# Altium PCB capacitive-liquid-level-sensor.PcbDoc
Units mil, origin at the board's own origin, x right, y up, seen from the top; angles counter-clockwise.
Board outline 2132.87 x 1078.74 mil, 2 copper layers (Top Layer, Bottom Layer), stack 61.756 mil thick; 31 components, 18 nets, 103 pads, 69 vias.
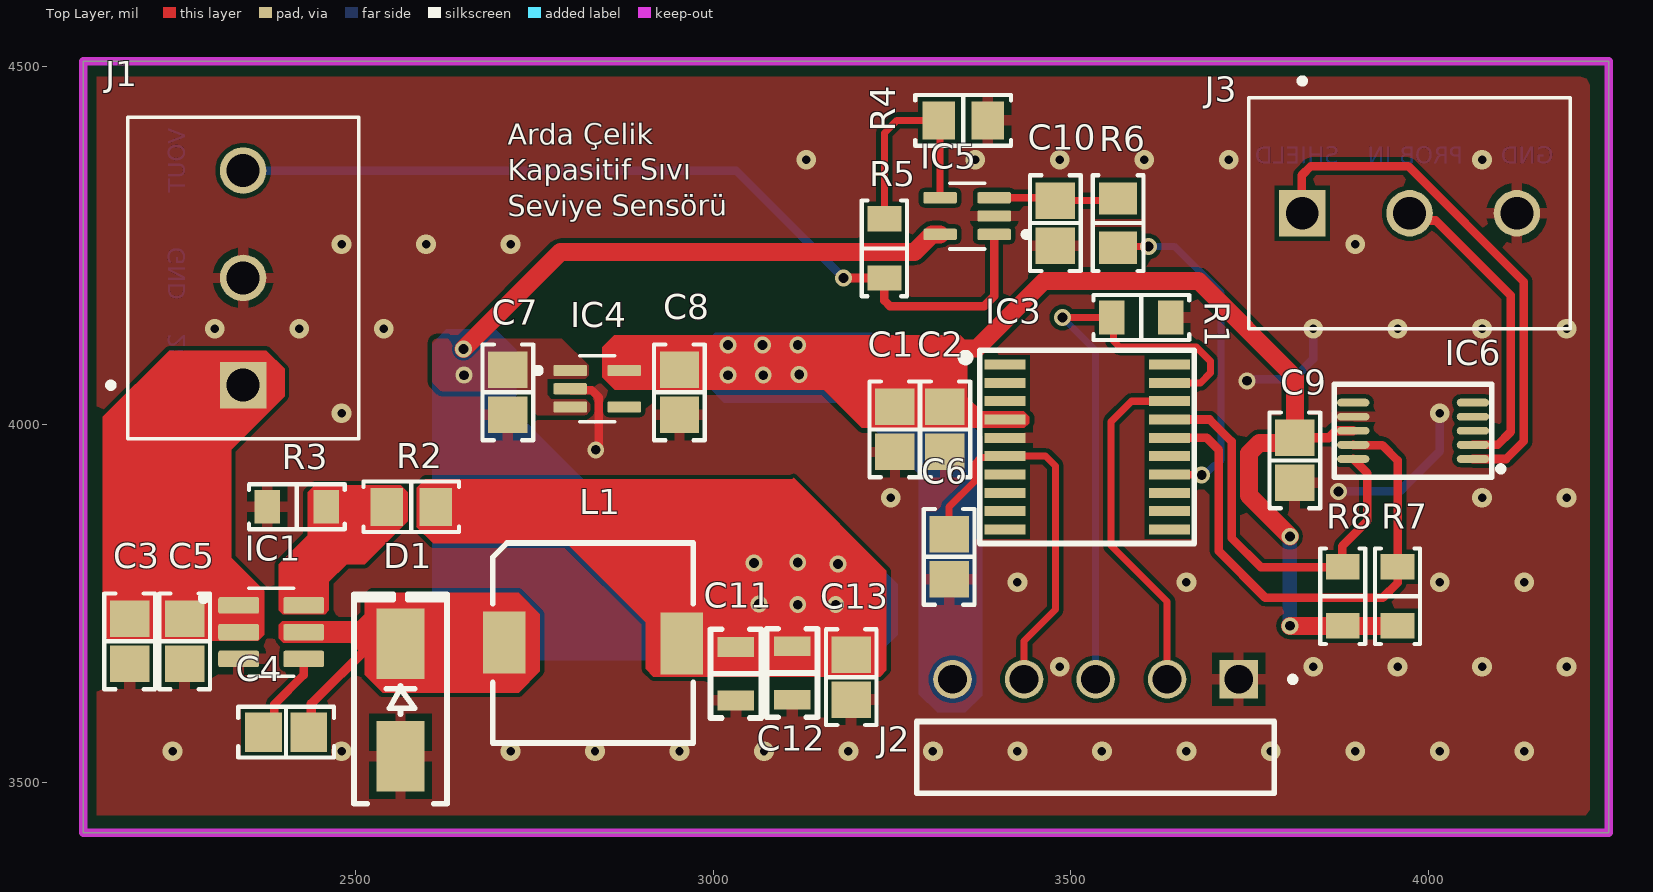
[diagram p0: Top Layer view]
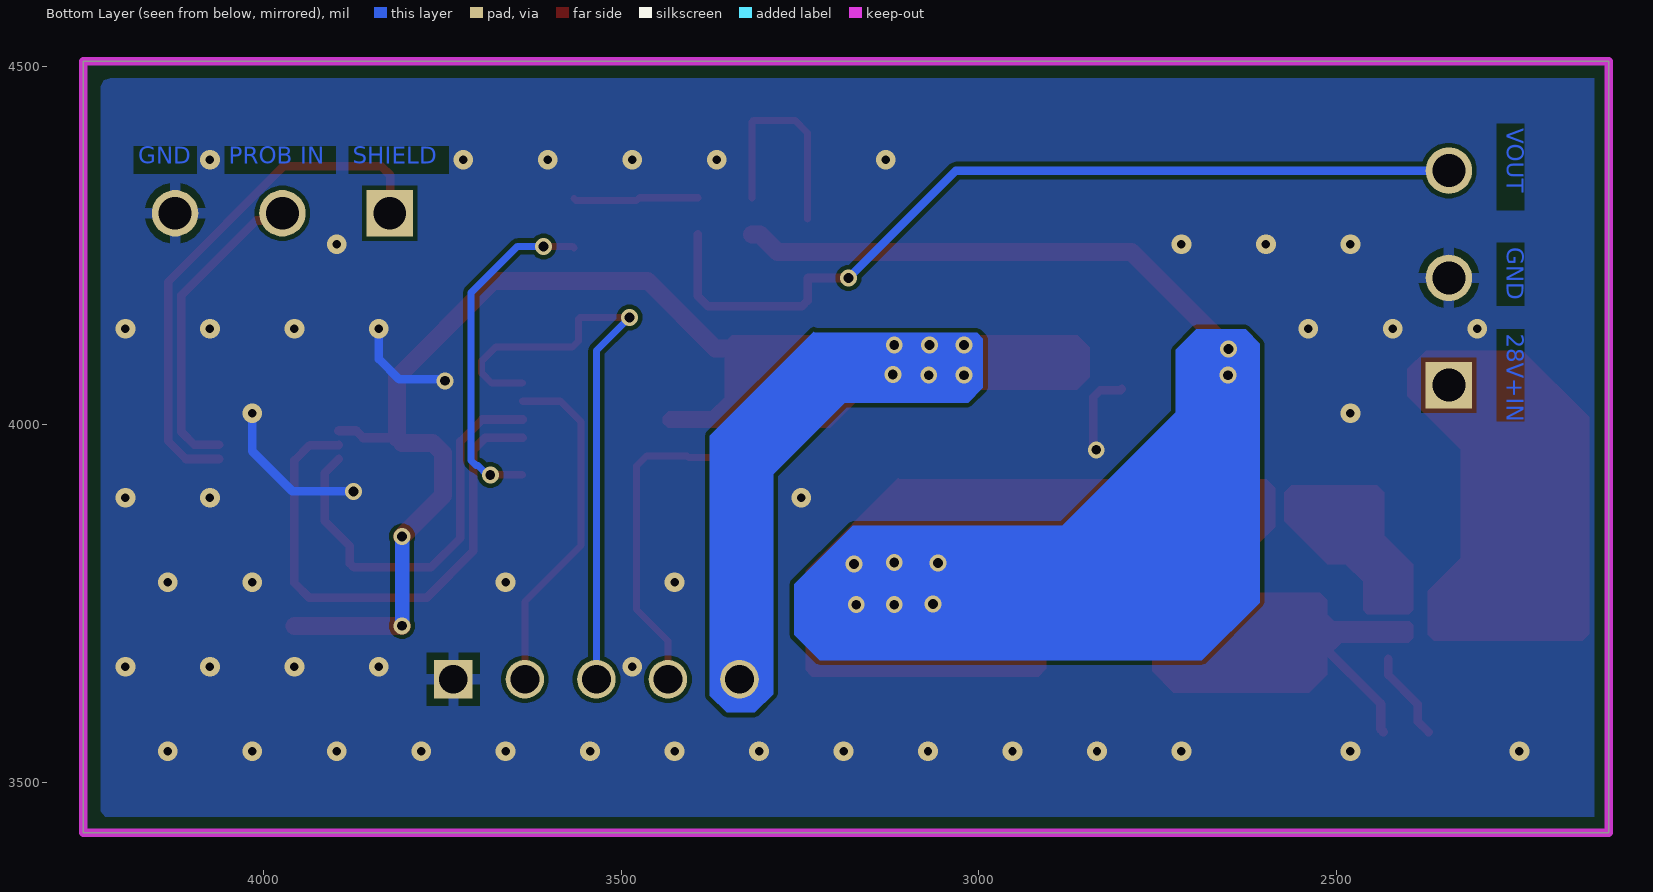
[diagram p1: Bottom Layer view, seen from below]
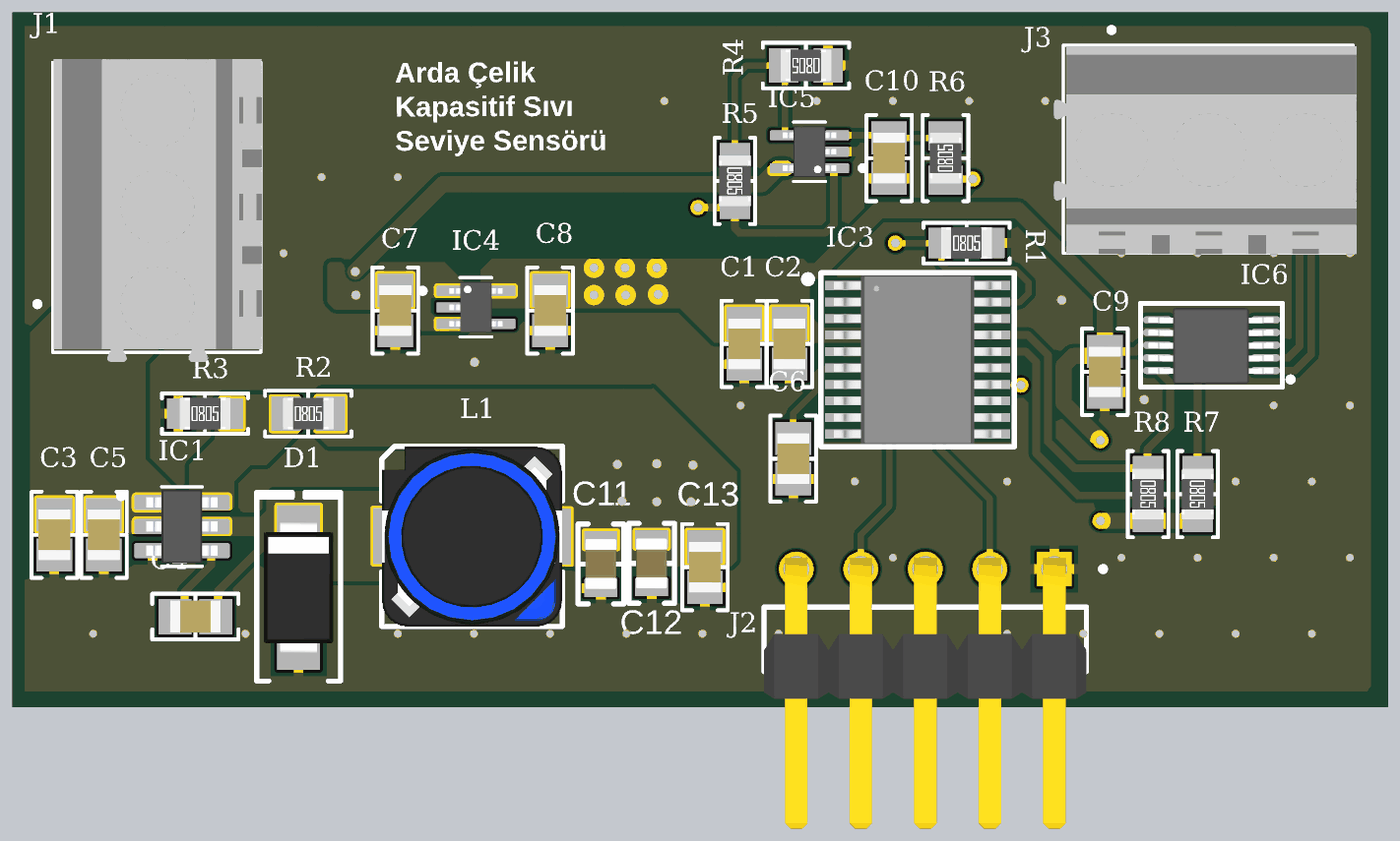
[diagram p2: 3D render of the assembled board from above, using the file's embedded part models]

## Layer stack, top to bottom
Top Solder: solder mask 1, SM-001, Dk 4
Top Layer: signal copper 1.378
Dielectric 1: core 59, Core-043, Dk 4.3
Bottom Layer: signal copper 1.378
Bottom Solder: solder mask 1, SM-001, Dk 4

## Board outline
2119.09,3429.13 4251.97,3429.13 4251.97,4507.87 2119.09,4507.87

## Design rules (kind name [scope] priority, off if disabled: settings)
Clearance [All] p1: gap=6 ignorepadtopadclearanceinfootprint=FALSE
Clearance Clearance_Polygon [InPolygon] p2: gap=10 ignorepadtopadclearanceinfootprint=FALSE
MinimumSolderMaskSliver [All] p1: minsoldermaskwidth=0
PlaneClearance [All] p1: clearance=30
PlaneConnect [All] p1: planeconnectstyle=Relief reliefexpansion=15 reliefentries=4 reliefconductorwidth=15 reliefairgap=10
PolygonConnect [All] p1: connectstyle=Relief reliefconductorwidth=15 reliefentries=4 polygonreliefangle="90 Angle" airgapwidth=10
RoutingVias [All] p1: holewidth=28 width=50 viastyle="Through Hole" minholewidth=28 minwidth=50 maxholewidth=28 maxwidth=50
SilkToSilkClearance [All] p1: silktosilkclearance=0
SilkToSolderMaskClearance [IsPad] p1: minsilkscreentomaskgap=0 clearancetoexposedcopper=TRUE
SolderMaskExpansion [All] p1: expansion=4 istentingtop=FALSE
SupplyNets "Schematic Supply Nets_3" [InNet('3.3V')] p1: voltage=0.000
SupplyNets "Schematic Supply Nets_2" [InNet('5V')] p2: voltage=0.000
SupplyNets "Schematic Supply Nets_1" [InNet('GND')] p3: voltage=0.000
SupplyNets "Schematic Supply Nets" [InNet('28V')] p4: voltage=0.000
Width [All] p1: maxlimit=35 minlimit=10 preferedwidth=10 minimp=50.000000 maximp=50.000000 favimp=50.000000
25 further rules are at their usual default settings.

## Components (designator, comment, footprint, x,y, rotation, side; value= is the part's Value field where it differs from the comment)
C1 "4.7µF" "CAP 0805_2012" 3253.94,3993.11 r90 top
C2 "0.1 µF" "CAP 0805_2012" 3323.82,3993.11 r90 top
C3 "0.1 µF" "CAP 0805_2012" 2184.06,3696.85 r90 top
C4 "0.1 µF" "CAP 0805_2012" 2402.72,3569.92 r180 top
C5 "4.7 µF" "CAP 0805_2012" 2260.83,3696.85 r90 top
C6 "0.1 µF" "CAP 0805_2012" 3329.72,3814.96 r90 top
C7 "1µF" "CAP 0805_2012" 2712.72,4044.92 r270 top
C8 "1µF" "CAP 0805_2012" 2952.72,4044.92 r270 top
C9 "0.1 µF" "CAP 0805_2012" 3812.99,3949.8 r90 top
C10 "1µF" "CAP 0805_2012" 3478.35,4281.5 r270 top
C11 "10 µF" "MURATA GRM21B 0805_2012" 3031.5,3651.57 r90 top
C12 "10 µF" "MURATA GRM21B 0805_2012" 3110.24,3652.56 r90 top
C13 "4.7µF" "CAP 0805_2012" 3192.91,3646.65 r90 top
D1 "SS16-M3/61T" "DO214AC SMA" 2562.72,3614.92 r90 top
IC1 "LMR14006YDDCR" TSOT-23-6 2381.89,3709.65 r0 top
IC3 "STM32G030F6P6" TSSOP20 3522.64,3968.5 r0 top
IC4 "TLV70033" SOT23-5 2837.72,4049.92 r0 top
IC5 "TLV9001IDBVR" SOT23-5 3354.92,4291.34 r180 top
IC6 "FDC1004DGSR" "10-VSSOP (DGS)" 3978.35,3991.14 r180 top
J1 "284392-3" 284392-3 2342.72,4204.92 r90 top
J2 "TSW-105-08-G-S-RA" TSW-105-08-G-S-RA 3534.45,3643.7 r0 top
J3 "284392-3" 284392-3 3973.43,4295.28 r0 top
L1 "10µH" "TDK SLF7032" 2831.73,3694.43 r0 top
R1 "10 kOhms" "YAGEO RES 0805_2012" 3598.43,4149.61 r0 top
R2 "54.9 kOhms" "RES 0805_2012" 2577.72,3884.92 r0 top
R3 "10 kOhms" "YAGEO RES 0805_2012" 2417.72,3884.92 r0 top
R4 "10 kOhms" "RES 0805_2012" 3349.41,4425.2 r180 top
R5 "4.7 kOhms" "YAGEO RES 0805_2012" 3239.17,4246.06 r270 top
R6 "10 kOhms" "RES 0805_2012" 3565.95,4281.5 r90 top
R7 "4.7 kOhms" "YAGEO RES 0805_2012" 3956.69,3759.84 r270 top
R8 "4.7 kOhms" "YAGEO RES 0805_2012" 3879.92,3759.84 r270 top

## Footprints (in the part's own frame and the unit in brackets; to place one, negate y for a bottom-side part, rotate by r counter-clockwise, add the part's x,y. Pads: shape width x height; smd on the part's side, far side on the other; paste and mask are expansions set on the pad)
"10-VSSOP (DGS)" [mm]
  oval 1.15x0.279 smd paste+0 mask+0: 1(-2.125,1) 2(-2.125,0.5) 3(-2.125,0) 4(-2.125,-0.5) 5(-2.125,-1) 6(2.125,-1) 7(2.125,-0.5) 8(2.125,0) 9(2.125,0.5) 10(2.125,1)
  silkscreen extent -3.16,-1.65 2.79,1.65, body extent -2.44,-1.5 2.49,1.54, height 1.16
284392-3 [mm]
  rect 1.65x1.65 / inner round 1.65 / far side rect 1.65x1.65 hole 1.168: 1(-3.81,0)
  round 1.65 hole 1.168: 2(0,0) 3(3.81,0)
  silkscreen extent -5.71,-4.1 5.71,4.8, body extent -6.09,-4.14 5.84,4.06, height 12.62
"CAP 0805_2012" [mm] "Chip Capacitor, 2-Leads, Body 2.00x1.20mm, IPC Medium Density"
  rect 1.3x1.4 smd: 1(-0.8,0) 2(0.8,0)
  silkscreen extent -1.7,-0.9 1.7,0.9, body extent -1,-0.64 1,0.64, height 1.26
"DO214AC SMA" [mm] "Molded Diode, 2-Leads, Body 4.30x2.60mm, IPC Medium Density"
  rect 2.5x1.7 smd: 1(-2,0) 2(2,0)
  silkscreen extent -3.68,-1.65 3.75,1.65, body extent -2.6,-1.37 2.6,1.37, height 2.4
"MURATA GRM21B 0805_2012" [mm] "Chip Capacitor, 2-Leads, Body 2.00x1.25mm"
  rect 0.7x1.3 smd: 1(-0.95,0) 2(0.95,0)
  silkscreen extent -1.58,-0.9 1.58,0.9, body extent -1,-0.63 1,0.63, height 1.25
"RES 0805_2012" [mm] "Chip Resistor, 2-Leads, Body 2.00x1.25mm, IPC Medium Density"
  rect 1.15x1.35 smd: 1(-0.875,0) 2(0.875,0)
  silkscreen extent -1.7,-0.9 1.7,0.9, body extent -1,-0.62 1,0.63, height 0.6
SOT23-5 [mm]
  rrect25% 1.19x0.4 smd: 1(-0.96,0.65) 2(-0.96,0) 3(-0.96,-0.65) 4(0.96,-0.65) 5(0.96,0.65)
  silkscreen extent -2.2,-1.17 0.63,1.17, body extent -1.05,-1 1.05,1, height 1.1
"TDK SLF7032" [mm] "Power Inductor, 2-Leads, TDK, SLF7032T-221MR29-2PF"
  rect 1.5x2.2 smd: 1(-3.15,0.013) 2(3.15,-0.012)
  silkscreen extent -3.56,-3.55 3.56,3.55, body extent -3.56,-3.56 3.56,3.54, height 3.39
TSOT-23-6 [mm]
  rrect25% 1.45x0.59 smd: 1(-1.155,0.95) 2(-1.155,0) 3(-1.155,-0.95) 4(1.155,-0.95) 5(1.155,0) 6(1.155,0.95)
  silkscreen extent -2.5,-1.57 0.8,1.57, body extent -1.4,-1.45 1.4,1.45, height 1.1
TSSOP20 [mil]
  rect 57.56x13.97 smd paste+0 mask+0: 1(-115,115.16) 2(-115,89.57) 3(-115,63.98) 4(-115,38.39) 5(-115,12.8) 6(-115,-12.8) 7(-115,-38.39) 8(-115,-63.98) 9(-115,-89.57) 10(-115,-115.16) 11(115,-115.16) 12(115,-89.57) 13(115,-63.98) 14(115,-38.39) 15(115,-12.8) 16(115,12.8) 17(115,38.39) 18(115,63.98) 19(115,89.57) 20(115,115.16)
  silkscreen extent -175,-135 150,135, body extent -130,-130 130,130, height 47
TSW-105-08-G-S-RA [mm]
  rect 1.37x1.37 hole 1.02: 1(5.08,0)
  round 1.37 hole 1.02: 2(2.54,0) 3(0,0) 4(-2.54,0) 5(-5.08,0)
  silkscreen extent -6.35,-4.04 7.1,0.1, body extent -6.35,-10.24 6.35,0.45, height 2.54
"YAGEO RES 0805_2012" [mm] "Chip Resistor, 2-Leads, Body 2.00x1.25mm"
  rect 0.9x1.2 smd: 1(-1.05,0) 2(1.05,0)
  silkscreen extent -1.7,-0.8 1.7,0.8, body extent -1,-0.62 1,0.63, height 0.6

## Part data
C1: library part 0805YC475MAT2A, "CAP CER 4.7UF 16V X7R 0805", Device Package="0805 (2012 Metric)", Manufacturer="AVX Corporation", Operating Temperature="-55°C ~ 125°C", Supplier Part Number 1=478-10575-1-ND, Temperature Coefficient=X7R, Tolerance=±20%, Voltage - Rated=16V, Applications="General Purpose", Capacitance=4.7µF, ComponentLink1Description=Datasheet, ComponentLink1URL=http://datasheets.avx.com/X7RDielectric.pdf, ComponentLink2Description="DigiKey Link", ComponentLink2URL=http://digikey.com/product-detail/en/avx-corporation/0805YC475MAT2A/478-10575-1-ND/6797621, lastupdated="2.09.2020 01:04:40", Lifecycle Status=Active, Minimum Order=1, Mounting Type="Surface Mount, MLCC", Package / Case="0805 (2012 Metric)", Packaging=TapeAndReel, Part Number=0805YC475MAT2A, Part Status=Active, partid=3443, price=0.12, series=-, Size / Dimension="0.079\" L x 0.049\" W (2.01mm x 1.25mm)", Supplier 1=DigiKey, Thickness (Max)="0.060\" (1.52mm)"
C2 C6 C9: library part 160R15W104KV4T, "CAP CER 0.1UF 16V X7R 0805", Device Package="0805 (2012 Metric)", Manufacturer="Johanson Dielectrics Inc.", Operating Temperature="-55°C ~ 125°C", Supplier Part Number 1=709-1183-1-ND, Temperature Coefficient=X7R, Tolerance=±10%, Voltage - Rated=16V, Applications="General Purpose", Capacitance="0.1 µF", ComponentLink1Description=Datasheet, ComponentLink1URL=https://www.johansondielectrics.com/downloads/catalog/johanson-dielectrics-product-catalog.pdf, ComponentLink2Description="DigiKey Link", ComponentLink2URL=https://www.digikey.com/en/products/detail/johanson-dielectrics-inc/160R15W104KV4T/1859428, lastupdated="9.02.2024 20:15:52", Lifecycle Status=Active, Minimum Order=1, Mounting Type="Surface Mount, MLCC", Package / Case="0805 (2012 Metric)", Packaging=TapeAndReel, Part Number=160R15W104KV4T, Part Status=Active, partid=9125, price=0.03, series=-, Size / Dimension="0.080\" L x 0.050\" W (2.03mm x 1.27mm)", Supplier 1=DigiKey, Thickness (Max)="0.050\" (1.27mm)"
C3: library part 885012207098, "CAP CER 0.1UF 50V X7R 0805", Device Package="0805 (2012 Metric)", Manufacturer="Würth Elektronik", Operating Temperature="-55°C ~ 125°C", Supplier Part Number 1=732-8080-1-ND, Temperature Coefficient=X7R, Tolerance=±10%, Voltage - Rated=50V, Applications="General Purpose", Capacitance="0.1 µF", ComponentLink1Description=Datasheet, ComponentLink1URL=https://katalog.we-online.de/pbs/datasheet/885012207098.pdf, ComponentLink2Description="DigiKey Link", ComponentLink2URL=https://www.digikey.com/en/products/detail/würth-elektronik/885012207098/5453935, lastupdated="9.02.2024 20:15:51", Lifecycle Status=Active, Minimum Order=1, Mounting Type="Surface Mount, MLCC", Package / Case="0805 (2012 Metric)", Packaging=TapeAndReel, Part Number=885012207098, Part Status=Active, partid=9164, price=0.03, series=WCAP-CSGP, Size / Dimension="0.079\" L x 0.049\" W (2.00mm x 1.25mm)", Supplier 1=DigiKey, Thickness (Max)="0.035\" (0.90mm)"
C4: library part 0805Y0250104KXT, "CAP CER 0.1UF 25V X7R 0805", Device Package="0805 (2012 Metric)", Manufacturer="Knowles Syfer", Operating Temperature="-55°C ~ 125°C", Supplier Part Number 1=1608-1010-1-ND, Temperature Coefficient=X7R, Tolerance=±10%, Voltage - Rated=25V, Applications="Boardflex Sensitive", Capacitance="0.1 µF", ComponentLink1Description=Datasheet, ComponentLink1URL=https://www.knowlescapacitors.com/getattachment/2dbfc8bc-e2b3-4b4d-afb1-43b011b9ebe0/High-Std-Voltage.aspx, ComponentLink2Description="DigiKey Link", ComponentLink2URL=https://www.digikey.com/en/products/detail/knowles-syfer/0805Y0250104KXT/5729991, Features="Soft Termination", lastupdated="9.02.2024 20:16:06", Lifecycle Status=Active, Minimum Order=1, Mounting Type="Surface Mount, MLCC", Package / Case="0805 (2012 Metric)", Packaging=TapeAndReel, Part Number=0805Y0250104KXT, Part Status=Active, partid=3471, price=0.15, series=FlexiCap™, Size / Dimension="0.079\" L x 0.049\" W (2.00mm x 1.25mm)", Supplier 1=DigiKey, Thickness (Max)="0.051\" (1.30mm)"
C5: library part CGA4J1X7R1H475K125AE, "CAP CER 4.7UF 50V X7R 0805", Device Package="0805 (2012 Metric)", Manufacturer="TDK Corporation", Operating Temperature="-55°C ~ 125°C", Ratings=AEC-Q200, Supplier Part Number 1=445-181410-1-ND, Temperature Coefficient=X7R, Tolerance=±10%, Voltage - Rated=50V, Applications="Automotive, Boardflex Sensitive", Capacitance="4.7 µF", ComponentLink1Description=Datasheet, ComponentLink1URL=https://product.tdk.com/info/en/catalog/datasheets/mlcc_automotive_soft_en.pdf?ref_disty=digikey, ComponentLink2Description="DigiKey Link", ComponentLink2URL=https://www.digikey.com/en/products/detail/tdk-corporation/CGA4J1X7R1H475K125AE/9744776, Features="Soft Termination", lastupdated="9.02.2024 20:15:46", Lifecycle Status=Active, Minimum Order=1, Mounting Type="Surface Mount, MLCC", Package / Case="0805 (2012 Metric)", Packaging=TapeAndReel, Part Number=CGA4J1X7R1H475K125AE, Part Status=Active, partid=39626, price=0.15, series=CGA, Size / Dimension="0.079\" L x 0.049\" W (2.00mm x 1.25mm)", Supplier 1=DigiKey, Thickness (Max)="0.059\" (1.50mm)"
C7 C8 C10: library part 0805YC105KAT4A, "CAP CER 1UF 16V X7R 0805", Device Package="0805 (2012 Metric)", Manufacturer="AVX Corporation", Operating Temperature="-55°C ~ 125°C", Supplier Part Number 1=478-11534-1-ND, Temperature Coefficient=X7R, Tolerance=±10%, Voltage - Rated=16V, Applications="General Purpose", Capacitance=1µF, ComponentLink1Description=Datasheet, ComponentLink1URL=http://datasheets.avx.com/X7RDielectric.pdf, ComponentLink2Description="DigiKey Link", ComponentLink2URL=http://digikey.com/product-detail/en/avx-corporation/0805YC105KAT4A/478-11534-1-ND/8108826, lastupdated="2.09.2020 01:04:40", Lifecycle Status=Active, Minimum Order=1, Mounting Type="Surface Mount, MLCC", Package / Case="0805 (2012 Metric)", Packaging=TapeAndReel, Part Number=0805YC105KAT4A, Part Status=Active, partid=3647, price=0.04, series=-, Size / Dimension="0.079\" L x 0.049\" W (2.01mm x 1.25mm)", Supplier 1=DigiKey, Thickness (Max)="0.055\" (1.40mm)"
C11 C12: library part GRM21BZ71E106KE15L, "CAP CER 10UF 25V X7R 0805", Device Package="0805 (2012 Metric)", Manufacturer="Murata Electronics", Operating Temperature="-55°C ~ 125°C", Supplier Part Number 1=490-GRM21BZ71E106KE15LCT-ND, Temperature Coefficient=X7R, Tolerance=±10%, Voltage - Rated=25V, Applications="General Purpose", Capacitance="10 µF", ComponentLink1Description=Datasheet, ComponentLink1URL=https://search.murata.co.jp/Ceramy/image/img/A01X/G101/ENG/GRM21BZ71E106KE15-01.pdf, ComponentLink2Description="DigiKey Link", ComponentLink2URL=https://www.digikey.com/en/products/detail/murata-electronics/GRM21BZ71E106KE15L/13904911, lastupdated="27.08.2024 09:29:54", Lifecycle Status=Active, Minimum Order=1, Mounting Type="Surface Mount, MLCC", Package / Case="0805 (2012 Metric)", Packaging=TapeAndReel, Part Number=GRM21BZ71E106KE15L, Part Status=Active, partid=47278, price=0.05, series=GRM, Size / Dimension="0.079\" L x 0.049\" W (2.00mm x 1.25mm)", Supplier 1=DigiKey, Thickness (Max)="0.057\" (1.45mm)"
C13: library part 08053C475MAT2A, "CAP CER 4.7UF 25V X7R 0805", Device Package="0805 (2012 Metric)", Manufacturer="AVX Corporation", Operating Temperature="-55°C ~ 125°C", Supplier Part Number 1=478-12472-1-ND, Temperature Coefficient=X7R, Tolerance=±20%, Voltage - Rated=25V, Applications="General Purpose", Capacitance=4.7µF, ComponentLink1Description=Datasheet, ComponentLink1URL=http://datasheets.avx.com/X7RDielectric.pdf, ComponentLink2Description="DigiKey Link", ComponentLink2URL=http://digikey.com/product-detail/en/avx-corporation/08053C475MAT2A/478-12472-1-ND/9749324, lastupdated="2.09.2020 01:04:10", Lifecycle Status=Active, Minimum Order=1, Mounting Type="Surface Mount, MLCC", Package / Case="0805 (2012 Metric)", Packaging=TapeAndReel, Part Number=08053C475MAT2A, Part Status=Active, partid=17332, price=0.12, series=-, Size / Dimension="0.079\" L x 0.049\" W (2.01mm x 1.25mm)", Supplier 1=DigiKey, Thickness (Max)="0.060\" (1.52mm)"
D1: "DIODE SCHOTTKY 1A 60V DO-214AC", Current - Average Rectified (Io)=1A, Current - Reverse Leakage @ Vr="200µA @ 60V", Manufacturer="Vishay Semiconductor Diodes Division", Operating Temperature - Junction="-65°C ~ 150°C", Package / Case="DO-214AC, SMA", Supplier Device Package="DO-214AC (SMA)", Supplier Part Number 1=SS16-M3/61TGICT-ND, Voltage - DC Reverse (Vr) (Max)=60V, Voltage - Forward (Vf) (Max) @ If="750mV @ 1A", ComponentLink1Description=Datasheet, ComponentLink1URL=//media.digikey.com/pdf/Data%20Sheets/Vishay%20Semiconductors/SS12-SS16.pdf, ComponentLink2Description="DigiKey Link", ComponentLink2URL=http://digikey.com/product-detail/en/vishay-semiconductor-diodes-division/SS16-M3-61T/SS16-M3-61TGICT-ND/9601211, Diode Type=Schottky, lastupdated="3.06.2024 19:54:33", Lifecycle Status=Active, Minimum Order=1, Mounting Type="Surface Mount", Packaging=TapeAndReel, Part Number=SS16-M3/61T, Part Status=Active, partid=1996, price=0.12, series=-, Speed="Fast Recovery =< 500ns, > 200mA (Io)", Supplier 1=DigiKey
IC1: "Buck Switching Regulator IC Positive Adjustable 0.765V 1 Output 600mA SOT-23-6 Thin, TSOT-23-6"
IC3: "ARM® Cortex®-M0+ STM32G0 Microcontroller IC 32-Bit 64MHz 32KB (32K x 8) FLASH 20-TSSOP"
IC4: "Linear Voltage Regulator IC Positive Fixed 1 Output 200mA SC-70-5"
IC5: "CMOS Amplifier 1 Circuit Rail-to-Rail SOT-23-5"
IC6: "Capacitive Touch Proximity Only 10-VSSOP"
J1 J3: library part "277-1264-ND(FDC1004 İÇİN)", "3 Position Wire to Board Terminal Block Horizontal with Board 0.200\" (5.08mm) Through Hole"
J2: "Connector Header Through Hole, Right Angle 5 position 0.100\" (2.54mm)"
L1: library part SLF7032T-100M1R4-2PF, "FIXED IND 10UH 1.4A 63.6 MOHM", Current Rating (Amps)=1.4A, DC Resistance (DCR)="63.6mOhm Max", Device Package=Nonstandard, Manufacturer="TDK Corporation", Operating Temperature="-40°C ~ 105°C", Supplier Part Number 1=445-1998-1-ND, Tolerance=±20%, Inductance Frequency - Test=100kHz, ComponentLink1Description=Datasheet, ComponentLink1URL=//media.digikey.com/pdf/Data%20Sheets/TDK%20PDFs/SLF7032_Type.pdf, ComponentLink2Description="DigiKey Link", ComponentLink2URL=http://digikey.com/product-detail/en/tdk-corporation/SLF7032T-100M1R4-2PF/445-1998-1-ND/755405, Height - Seated (Max)="0.134\" (3.40mm)", lastupdated="2.09.2020 01:30:24", Lifecycle Status=Active, Material - Core=Ferrite, Minimum Order=1, Mounting Type="Surface Mount", Package / Case=Nonstandard, Packaging=TapeAndReel, Part Number=SLF7032T-100M1R4-2PF, Part Status=Active, partid=3677, price=0.43, series=SLF, Shielding=Shielded, Size / Dimension="0.276\" L x 0.276\" W (7.00mm x 7.00mm)", Supplier 1=DigiKey, Type=Wirewound, Inductance=10µH
R1: library part RV0805FR-0710KL, "RES 10K OHM 1% 1/8W 0805", Device Package="0805 (2012 Metric)", Manufacturer=Yageo, Operating Temperature="-55°C ~ 155°C", Power (Watts)="0.125W, 1/8W", Ratings=AEC-Q200, Supplier Device Package=0805, Supplier Part Number 1=13-RV0805FR-0710KLCT-ND, Temperature Coefficient=±200ppm/°C, Tolerance=±1%, ComponentLink1Description=Datasheet, ComponentLink1URL=https://www.yageo.com/upload/media/product/productsearch/datasheet/rchip/PYu-RV_51_RoHS_L_12.pdf, ComponentLink2Description="DigiKey Link", ComponentLink2URL=https://www.digikey.com/en/products/detail/yageo/RV0805FR-0710KL/17021062, Composition="Thick Film", Features="Automotive AEC-Q200, High Voltage, Moisture Resistant", Height - Seated (Max)="0.024\" (0.60mm)", lastupdated="25.07.2024 09:19:57", Lifecycle Status=Active, Minimum Order=1, Number of Terminations=2, Package / Case="0805 (2012 Metric)", Packaging=TapeAndReel, Part Number=RV0805FR-0710KL, partid=87554, price=0.05, Resistance="10 kOhms", series=RV, Size / Dimension="0.079\" L x 0.049\" W (2.00mm x 1.25mm)", Supplier 1=DigiKey
R2: library part CRCW080554K9FKEA, "RES SMD 54.9K OHM 1% 1/8W 0805", Device Package="0805 (2012 Metric)", Manufacturer="Vishay Dale", Operating Temperature="-55°C ~ 155°C", Power (Watts)="0.125W, 1/8W", Ratings=AEC-Q200, Supplier Device Package=0805, Supplier Part Number 1=541-54.9KCCT-ND, Temperature Coefficient=±100ppm/°C, Tolerance=±1%, ComponentLink1Description=Datasheet, ComponentLink1URL=http://www.vishay.com/docs/20035/dcrcwe3.pdf, ComponentLink2Description="DigiKey Link", ComponentLink2URL=https://www.digikey.com/en/products/detail/vishay-dale/CRCW080554K9FKEA/1175835, Composition="Thick Film", Features="Automotive AEC-Q200", Height - Seated (Max)="0.020\" (0.50mm)", lastupdated="8.02.2024 21:02:25", Lifecycle Status=Active, Minimum Order=1, Number of Terminations=2, Package / Case="0805 (2012 Metric)", Packaging=TapeAndReel, Part Number=CRCW080554K9FKEA, Part Status=Active, partid=30745, price=0.01, Resistance="54.9 kOhms", series=CRCW, Size / Dimension="0.079\" L x 0.049\" W (2.00mm x 1.25mm)", Supplier 1=DigiKey
R3: library part RT0805FRE0710KL, "RES SMD 10K OHM 1% 1/8W 0805", Device Package="0805 (2012 Metric)", Manufacturer=Yageo, Operating Temperature="-55°C ~ 155°C", Power (Watts)="0.125W, 1/8W", Supplier Device Package=0805, Supplier Part Number 1=YAG1239CT-ND, Temperature Coefficient=±50ppm/°C, Tolerance=±1%, ComponentLink1Description=Datasheet, ComponentLink1URL=https://www.yageo.com/upload/media/product/productsearch/datasheet/rchip/PYu-RT_1-to-0.01_RoHS_L_11.pdf, ComponentLink2Description="DigiKey Link", ComponentLink2URL=https://www.digikey.com/en/products/detail/yageo/RT0805FRE0710KL/1078908, Composition="Thin Film", Height - Seated (Max)="0.024\" (0.60mm)", lastupdated="25.07.2024 09:20:25", Lifecycle Status=Active, Minimum Order=1, Number of Terminations=2, Package / Case="0805 (2012 Metric)", Packaging=TapeAndReel, Part Number=RT0805FRE0710KL, Part Status=Active, partid=32332, price=0.01, Resistance="10 kOhms", series=RT, Size / Dimension="0.079\" L x 0.049\" W (2.00mm x 1.25mm)", Supplier 1=DigiKey
R4 R6: library part CRCW080510K0FKEA, "RES SMD 10K OHM 1% 1/8W 0805", Device Package="0805 (2012 Metric)", Manufacturer="Vishay Dale", Operating Temperature="-55°C ~ 155°C", Power (Watts)="0.125W, 1/8W", Ratings=AEC-Q200, Supplier Device Package=0805, Supplier Part Number 1=541-10.0KCCT-ND, Temperature Coefficient=±100ppm/°C, Tolerance=±1%, ComponentLink1Description=Datasheet, ComponentLink1URL=http://www.vishay.com/docs/20035/dcrcwe3.pdf, ComponentLink2Description="DigiKey Link", ComponentLink2URL=https://www.digikey.com/en/products/detail/vishay-dale/CRCW080510K0FKEA/1175751, Composition="Thick Film", Features="Automotive AEC-Q200", Height - Seated (Max)="0.020\" (0.50mm)", lastupdated="8.02.2024 21:02:37", Lifecycle Status=Active, Minimum Order=1, Number of Terminations=2, Package / Case="0805 (2012 Metric)", Packaging=TapeAndReel, Part Number=CRCW080510K0FKEA, Part Status=Active, partid=28101, price=0.01, Resistance="10 kOhms", series=CRCW, Size / Dimension="0.079\" L x 0.049\" W (2.00mm x 1.25mm)", Supplier 1=DigiKey
R5 R7 R8: library part RC0805FR-074K7P, "RES 4.7K OHM 1% 1/8W 0805", Device Package="0805 (2012 Metric)", Manufacturer=Yageo, Operating Temperature="-55°C ~ 155°C", Power (Watts)="0.125W, 1/8W", Ratings="7C1 RoHS w/out Exemption (100% Pb-Free)", Supplier Device Package=0805, Supplier Part Number 1=YAG1325CT-ND, Temperature Coefficient=±100ppm/°C, Tolerance=±1%, ComponentLink1Description=Datasheet, ComponentLink1URL=http://www.yageo.com/NewPortal/yageodocoutput?fileName=/pdf/R-Chip/PYu-RC_51_RoHS_P_0.pdf, ComponentLink2Description="DigiKey Link", ComponentLink2URL=https://www.digikey.com/en/products/detail/yageo/RC0805FR-074K7P/4935340, Composition="Thick Film", Features="Moisture Resistant", Height - Seated (Max)="0.024\" (0.60mm)", lastupdated="25.07.2024 09:20:26", Lifecycle Status=Active, Minimum Order=1, Number of Terminations=2, Package / Case="0805 (2012 Metric)", Packaging=TapeAndReel, Part Number=RC0805FR-074K7P, Part Status=Active, partid=27895, price=0.01, Resistance="4.7 kOhms", series=RC_P, Size / Dimension="0.079\" L x 0.049\" W (2.00mm x 1.25mm)", Supplier 1=DigiKey

## Via types
v1: diameter 27.56, hole 11.81, Top Layer to Bottom Layer, tented both sides, 46 vias
v2: diameter 23.62, hole 13.78, Top Layer to Bottom Layer, 12 vias
v3: diameter 23.62, hole 13.78, Top Layer to Bottom Layer, tented both sides, 11 vias

## Nets (pads, with @x,y where several pads share a name; then routed paths per layer and width w, separated by ;. In a path a pad name is that pad's centre, name@x,y a point inside that pad or via, vN(x,y) a via of type N, cw(c..) or ccw(c..) an arc to the next point about the centre after c; other vN are vias at no path point)
3.3V: C1.2 C2.2 C8.1 C9.2 IC3.4 IC4.5 IC6.8 J2.5 R7.2 R8.2 | length 1259.5
  Top Layer w13: C9.2 3860.52,3981.3 3870.36,3991.14 IC6.8
  Top Layer w25: 3307.09,4106.3 3368.35,4106.3 3462.84,4200.79 3678.15,4200.79 3812.99,4065.94 C9.2 3806.05,3974.35 3763.76,3974.35 3749.11,3959.71 3749.11,3900.5 v2(3806.1,3843.5) ; v2(3806.1,3718.5) R8.2 R7.2
  Bottom Layer w20: v2(3806.1,3718.5) v2(3806.1,3843.5)
  other v2: 3020.67,4068.9 3069.88,4068.9 3120.08,4069.88 3020.67,4111.22 3068.9,4111.22 3118.11,4111.22
5V: C7.1 C11.2 C12.2 C13.2 IC4.1 IC4.3 IC5.5 L1.2 R2.2 | length 734.3
  Top Layer w12: C7.1 C7.1@2713.62,4075.51
  Top Layer w25: v3(2650.59,4105.31) 2786.42,4241.14 3281.22,4241.14 3305.83,4265.75 IC5.5
  other v3: 3118.11,3748.03 3171.26,3748.03 3063.98,3749.02 3174.21,3805.12 3057.09,3806.1 3118.11,3807.09 2651.57,4068.9
28V: C3.2 C5.2 IC1.1 IC1.2 J1.1
GND: C1.1 C2.1 C3.1 C5.1 C6.1 C7.2 C8.2 C9.1 C10.2 C11.1 C12.1 C13.1 D1.1 IC1.3 IC3.5 IC4.2 IC5.2 IC6.7 J1.2 J2.1 J3.3 R1.2 R3.1 R4.1 | length 485.8
  Top Layer w12: IC4.2 2801.8,4048.05 2829.82,4048.05 2840.07,4037.8 2840.07,3972.15 2835.63,3967.71 v3(2835.63,3964.57)
  Bottom Layer w12: v3(3746.06,4061.02) 3748.29,4063.25 3810.29,4063.25 3838.58,4091.53 v1(3838.58,4133.86) ; v3(3874.02,3906.5) 3959.65,3906.5 4015.75,3962.6 v1(4015.75,4015.75)
  other v1: 2244.09,3543.31 2480.31,3543.31 2716.53,3543.31 2834.64,3543.31 2952.76,3543.31 3070.87,3543.31 3188.98,3543.31 3307.09,3543.31 3425.2,3543.31 3543.31,3543.31 3661.42,3543.31 3779.53,3543.31 3897.64,3543.31 4015.75,3543.31 4133.86,3543.31 3484.25,3661.42 3838.58,3661.42 3956.69,3661.42 4074.8,3661.42 4192.91,3661.42 3425.2,3779.53 3661.42,3779.53 4015.75,3779.53 4133.86,3779.53 3248.03,3897.64 4074.8,3897.64 4192.91,3897.64 2480.31,4015.75 2303.15,4133.86 2421.26,4133.86 2539.37,4133.86 3956.69,4133.86 4074.8,4133.86 4192.91,4133.86 2480.31,4251.97 2598.42,4251.97 2716.53,4251.97 3897.64,4251.97 3129.92,4370.08 3366.14,4370.08 3484.25,4370.08 3602.36,4370.08 3720.47,4370.08 4074.8,4370.08
I2C_SCL: IC3.16 IC6.9 R7.1 | length 745.4
  Top Layer w12: IC3.16 3689.96,3981.3 3706.61,3964.65 3706.61,3822.92 3771.65,3757.87 3936.02,3757.87 3956.69,3778.54 R7.1 3956.69,3949.8 3935.32,3971.17 3894.97,3971.17 IC6.9
I2C_SDA: IC3.17 IC6.10 R8.1 | length 577.1
  Top Layer w12: IC3.17 3693.9,4006.89 3724.61,3976.18 3724.61,3841.33 3765.6,3800.34 3873.76,3800.34 3879.08,3805.66 3879.08,3829.87 3914.37,3865.16 3914.37,3932.09 IC6.10
LEVEL_SENS: IC6.2 J3.2 | length 440.1
  Top Layer w12: J3.2 3983.56,4285.14 4010.13,4285.14 4114.87,4180.4 4114.87,3989.87 4096.46,3971.46 IC6.2
MCU_PWM: IC3.14 R6.1 | length 486.7
  Top Layer w10: R6.1 3567.91,4249.02 v2(3608.27,4249.02) ; IC3.14 3638.13,3929.63 3682.31,3929.63 v2(3682.8,3929.13)
  Bottom Layer w10: v2(3608.27,4249.02) 3644.69,4249.02 3709.65,4184.06 3709.65,3949.8 3702.57,3942.73 3700.08,3942.73 3686.49,3929.13 v2(3682.8,3929.13)
NetC4_1: C4.1 D1.2 IC1.5 L1.1 | length 200.6
  Top Layer w13: C4.1 2438.11,3573.81 2438.11,3609.37 2519.86,3691.12 2560.17,3691.12 D1.2
NetC4_2: C4.2 IC1.4 | length 125.6
  Top Layer w12: C4.2 2386.07,3584.77 2386.07,3608.45 2427.27,3649.66 2427.27,3672.16 IC1.4
NetC10_1: C10.1 IC5.3 R6.2 | length 176.1
  Top Layer w10: IC5.3 3474.41,4316.93 C10.1 3562.99,4312.99 R6.2
NetR2_1: IC1.6 R2.1 R3.2
NetR4_2: IC5.4 R4.2 R5.1 | length 312.4
  Top Layer w10: R5.1 3239.17,4407.48 3256.89,4425.2 R4.2 3317.13,4423.03 IC5.4
NRST: C6.2 IC3.6 J2.4 | length 550.1
  Top Layer w10: C6.2 3329.72,3884.84 3365.16,3920.28 3365.16,3944.88 3374,3953.72 IC3.6@3405.65,3953.72 ; IC3.6 3464.57,3955.71 3478.35,3941.93 3478.35,3741.14 3434.45,3697.24 J2.4
SHIELD: IC6.1 J3.1 | length 740.1
  Top Layer w12: J3.1 3822.83,4295.87 3822.83,4348.43 3835.63,4361.22 3971.46,4361.22 4132.87,4199.8 4132.87,3976.38 4108.27,3951.77 IC6.1
SWCLK: IC3.19 J2.3 R1.1 | length 854.6
  Top Layer w10: v2(3488.19,4149.61) R1.1 3559.34,4147.35 3559.34,4116.84 3567.91,4108.27 3675.2,4108.27 3694.88,4088.58 3694.88,4071.85 3681.1,4058.07 IC3.19
  Bottom Layer w10: v2(3488.19,4149.61) 3534.45,4103.35 J2.3
SWDIO: IC3.18 J2.2 | length 486
  Top Layer w10: J2.2 3634.45,3752.36 3556.1,3830.71 3556.1,4003.94 3584.65,4032.48 IC3.18
VOUT: IC5.1 J1.3 R5.2 | length 1239.1
  Top Layer w12: v2(3182.09,4204.72) R5.2 3239.17,4173.23 3247.05,4165.35 3378.66,4165.35 3392.72,4179.41 IC5.1
  Bottom Layer w12: J1.3 3031.89,4354.92 v2(3182.09,4204.72)
pads on no net: IC3.1 IC3.2 IC3.3 IC3.7 IC3.8 IC3.9 IC3.10 IC3.11 IC3.12 IC3.13 IC3.15 IC3.20 IC4.4 IC6.3 IC6.4 IC6.5 IC6.6

## Polygon pours and split planes (outlines as drawn)
GND on Top Layer "GND_L01_P000" (solid, remove dead copper, pour order 0): 4225.39,4486.22 4225.39,3455.71 4221.46,3451.77 4219.49,3453.74 2137.8,3453.74 2137.8,4486.22 4218.5,4486.22 4221.46,4483.27
5V on Top Layer "Top Layer-5V" (solid, pour order 7): 2607.28,4058.07 2619.09,4046.26 2625,4046.26 2745.08,4046.26 2745.08,4021.65 2753.94,4012.8 2821.85,4012.8 2827.76,4018.7 2827.76,4029.53 2821.85,4035.43 2773.62,4035.43 2767.72,4041.34 2767.72,4062.99 2768.7,4063.98 2820.87,4063.98 2825.79,4068.9 2825.79,4082.68 2788.39,4120.08 2611.22,4120.08 2607.28,4116.14
GND on Bottom Layer "GND_L02_P002" (solid, remove dead copper, pour order 2): 4227.36,4484.25 4227.36,3453.74 4223.43,3449.8 4221.46,3451.77 2139.76,3451.77 2139.76,4484.25 4220.47,4484.25 4223.43,4481.3

## Keep-outs
Keep-Out Layer:
  lines w11.81: 2119.09,3429.13 4251.97,3429.13 4251.97,4507.87 2164.37,4507.87 2119.09,4507.87 2119.09,3429.13

## Other copper
Top Layer:
  region net 28V: 2146.65,3706.69 2155.51,3697.83 2364.17,3697.83 2372.05,3705.71 2372.05,3707.68 2372.05,3767.72 2325.79,3813.98 2325.79,3964.57 2400.59,4039.37 2400.59,4077.76 2375,4103.35 2239.17,4103.35 2146.65,4010.83
  region net 3.3V: 2844.49,4108.27 2844.49,4091.54 2844.49,4065.94 2862.2,4048.23 3154.53,4048.23 3207.68,3995.08 3435.04,3995.08 3441.93,4001.97 3441.93,4003.94 3441.93,4010.83 3434.06,4018.7 3375,4018.7 3355.32,4038.39 3355.32,4115.16 3345.47,4125 2861.22,4125
  region net 5V: 2597.44,3923.23 2585.63,3911.42 2585.63,3858.27 2584.65,3857.28 2608.27,3833.66 2795.28,3833.66 2905.51,3723.43 2905.51,3658.46 2916.34,3647.64 3233.27,3647.64 3242.13,3656.5 3242.13,3795.28 3112.2,3925.2 3110.24,3923.23
  region net NetR2_1: 2457.72,3734.92 2397.95,3734.92 2392.72,3740.16 2392.72,3804.92 2432.72,3844.92 2432.72,3904.92 2442.72,3914.92 2562.72,3914.92 2572.72,3904.92 2572.72,3864.92 2512.72,3804.92 2487.72,3804.92 2462.72,3779.92 2462.72,3739.92
  region net NetC4_1: 2392.72,3719.92 2392.72,3700.79 2398.58,3694.92 2492.72,3694.92 2512.72,3674.92 2512.72,3649.92 2537.72,3624.92 2727.72,3624.92 2757.72,3654.92 2757.72,3734.92 2727.72,3764.92 2522.72,3764.92 2512.72,3754.92 2512.72,3734.92 2502.72,3724.92 2397.72,3724.92 2502.72,3724.92 2397.72,3724.92
Bottom Layer:
  region net 3.3V: 3001.97,4127.95 2994.09,4120.08 2994.09,4051.18 3014.76,4030.51 3187.01,4030.51 3287.4,3930.12 3287.4,3623.03 3312.99,3597.44 3318.9,3597.44 3352.36,3597.44 3375.98,3621.06 3375.98,3984.25 3230.32,4129.92 3228.35,4127.95
  region net 5V: 3222.44,3670.28 3257.87,3705.71 3257.87,3776.57 3176.18,3858.27 2882.87,3858.27 2724.41,4016.73 2724.41,4104.33 2695.87,4132.87 2626.97,4132.87 2607.28,4113.19 2607.28,3750.98 2687.99,3670.28
  text "VOUT" at 2269.2,4414.37 h40 r90
  text "SHIELD" at 3875,4356.78 h40
  text "PROB IN" at 4048.23,4356.78 h40
  text "GND" at 4175.2,4356.78 h40
  text "GND" at 2269.2,4248.03 h40 r90
  text "28V+IN" at 2269.2,4126.97 h40 r90

## Silkscreen, mask and mechanical layers (free items; w line width, h text height)
Top Overlay:
  text "Arda Çelik / Kapasitif Sıvı  / Seviye Sensörü" at 2712.6,4281.5 h50 r0.17